# Altium PCB PCB2ASCi.PcbDoc
Units mm, origin at the board's own origin, x right, y up, seen from the top; angles counter-clockwise.
Board outline 54.74 x 52.45 mm, 2 copper layers (Top Layer, Bottom Layer); 51 components, 50 nets, 207 pads, 14 vias.
Unrouted connection lines stored in the file: 3.
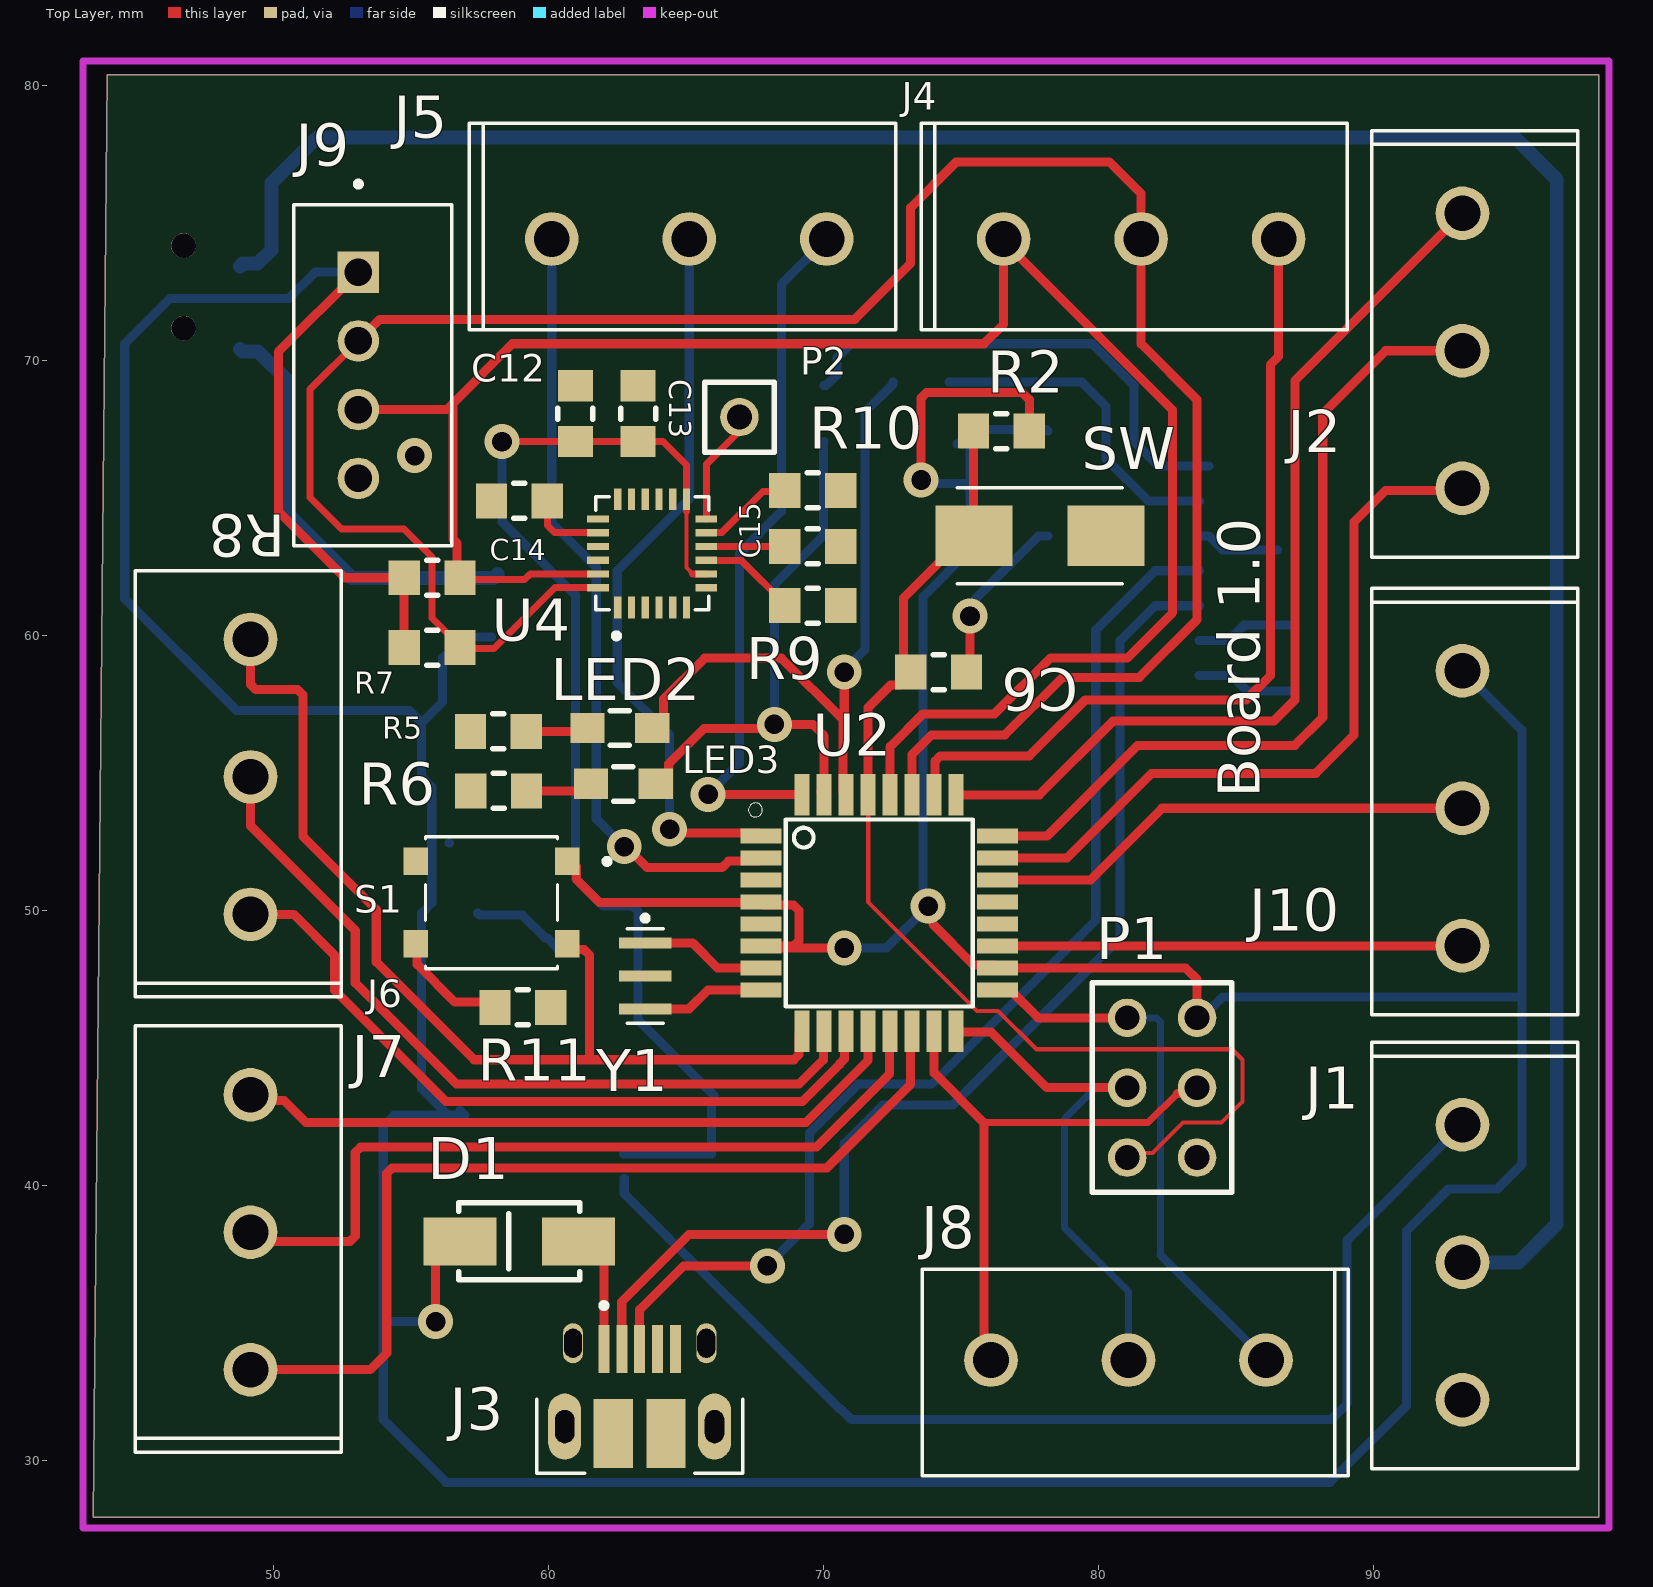
[diagram p0: Top Layer view]
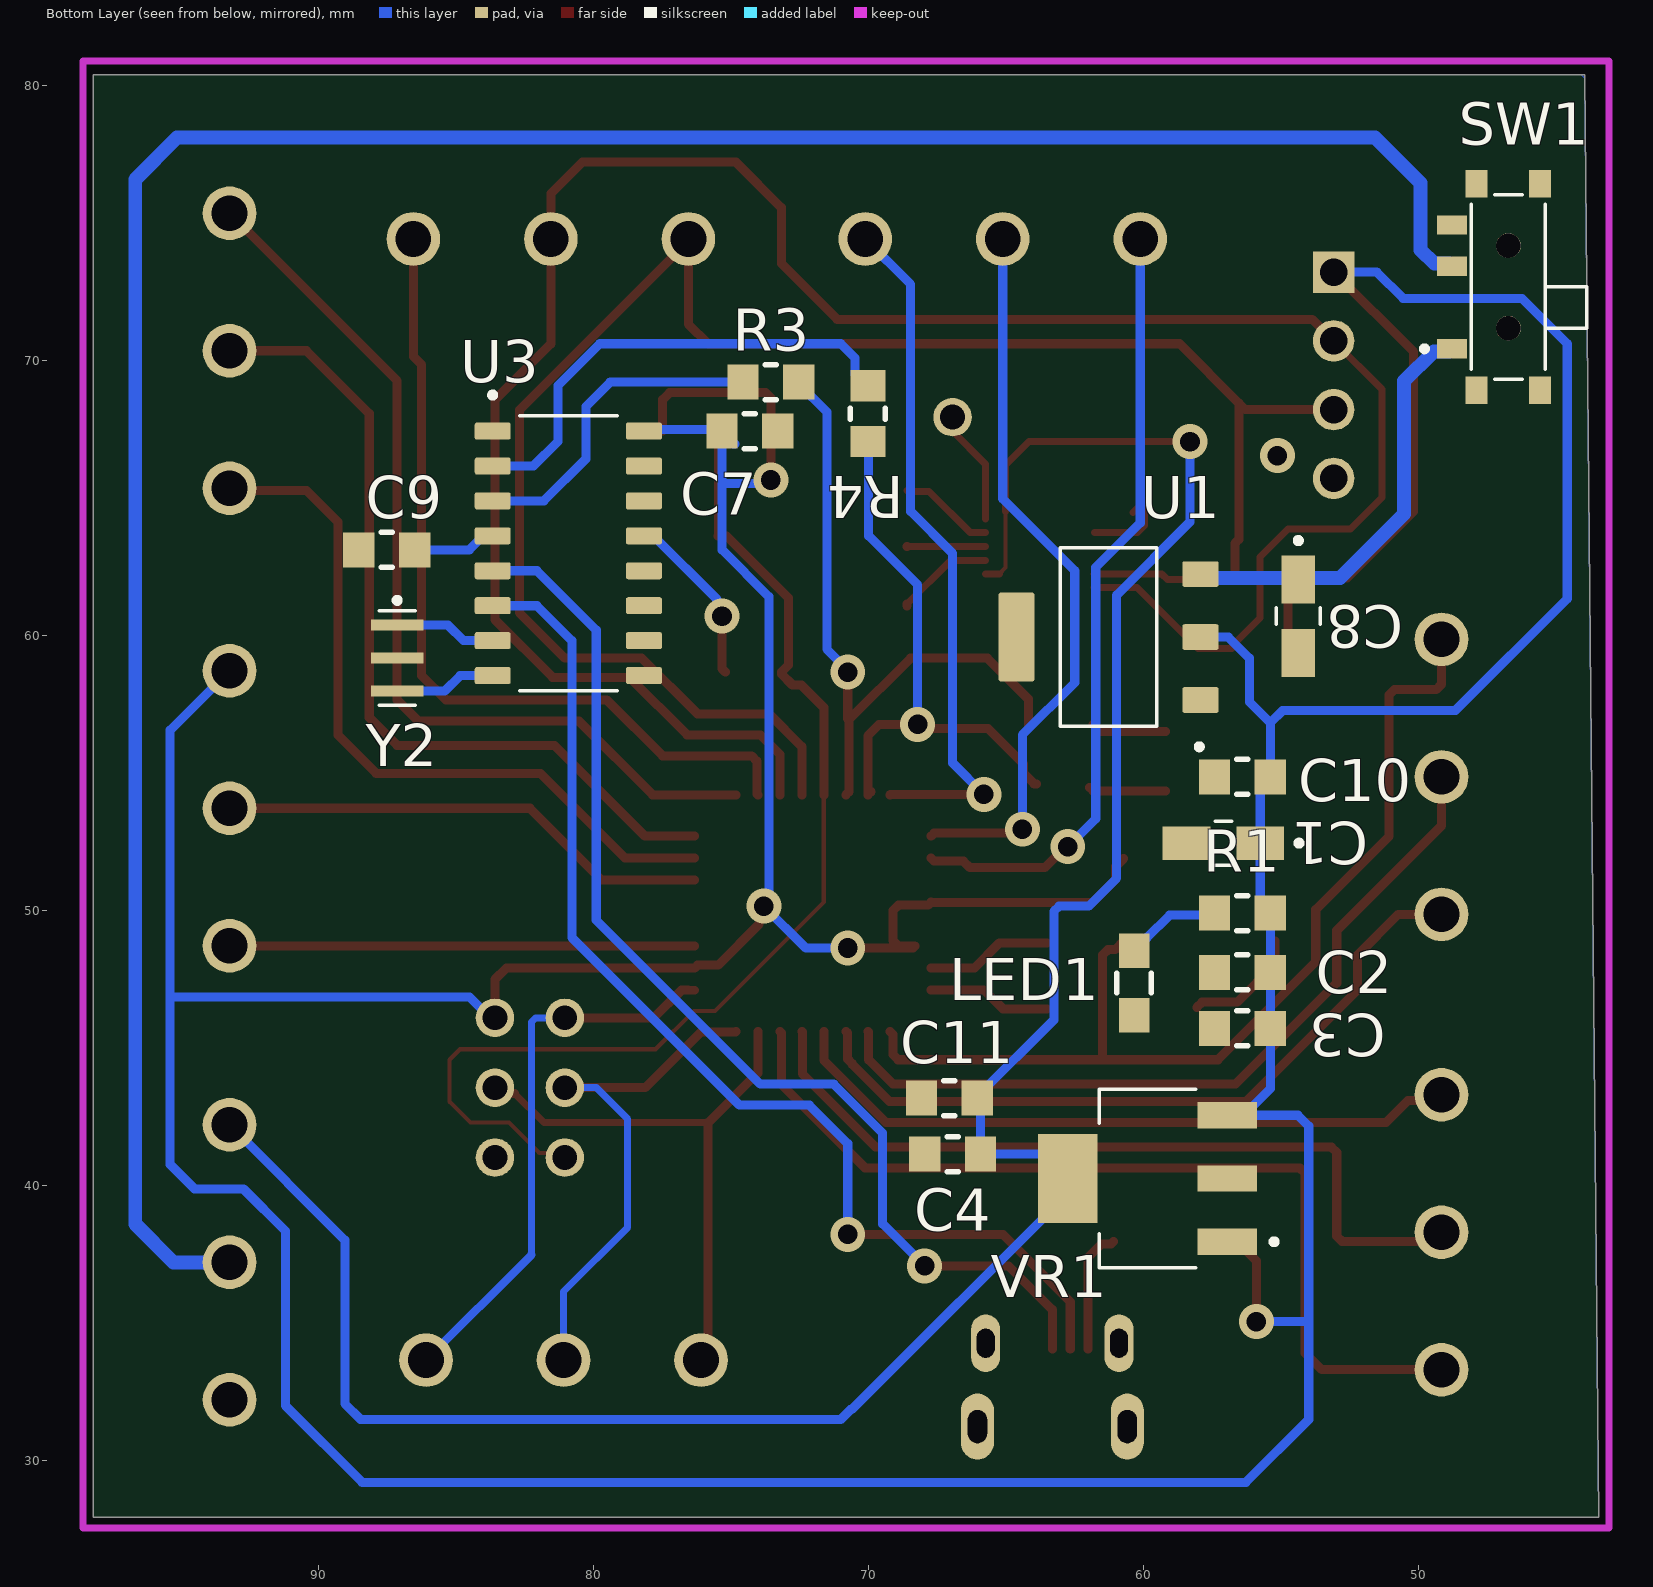
[diagram p1: Bottom Layer view, seen from below]

## Layer stack, top to bottom
Top Solder: solder mask 0.0102, Solder Resist, Dk 3.5
Top Layer: signal copper 0.0356
Dielectric 1: dielectric 0.32, FR-4, Dk 4.8
Bottom Layer: signal copper 0.0356
Bottom Solder: solder mask 0.0102, Solder Resist, Dk 3.5

## Board outline
43.942,80.391 98.171,80.391 98.171,27.94 43.434,27.94

## Design rules (kind name [scope] priority, off if disabled: settings)
AssemblyTestPointUsage [All] p0: scope1count=1 scope1_0_kind=Board scope1_0_value=Board scope2count=1 scope2_0_kind=Board scope2_0_value=Board commentlength=0
AssemblyTestpoint [All] p0: scope1count=1 scope1_0_kind=Board scope1_0_value=Board scope2count=1 scope2_0_kind=Board scope2_0_value=Board commentlength=0
Clearance [All] p0: scope1count=1 scope1_0_kind=Board scope1_0_value=Board scope2count=1 scope2_0_kind=Board scope2_0_value=Board commentlength=0 gap=0.178
Clearance [All] p1: gap=0.178 ignorepadtopadclearanceinfootprint=FALSE except(0: Arc-Hole Track-Hole SMDPad-Hole THPad-Hole Via-Hole Fill-Hole Poly-Hole Region-Hole Text-Hole)
ComponentClearance [All] p0: scope1count=1 scope1_0_kind=Board scope1_0_value=Board scope2count=1 scope2_0_kind=Board scope2_0_value=Board commentlength=0 gap=0.254 collisioncheckmode=3
DiffPairsRouting [All] p0: scope1count=1 scope1_0_kind=Board scope1_0_value=Board scope2count=1 scope2_0_kind=Board scope2_0_value=Board commentlength=0
FabricationTestPointUsage [All] p0: scope1count=1 scope1_0_kind=Board scope1_0_value=Board scope2count=1 scope2_0_kind=Board scope2_0_value=Board commentlength=0 valid=0 allowmultiple=FALSE
FabricationTestpoint [All] p0: scope1count=1 scope1_0_kind=Board scope1_0_value=Board scope2count=1 scope2_0_kind=Board scope2_0_value=Board commentlength=0 side=3 testpointundercomponent=TRUE minsize=1.016 maxsize=2.54 preferedsize=1.524 minholesize=0 maxholesize=1.016 preferedholesize=0.813 testpointgrid=0.025
FanoutControl Fanout_BGA [All] p0 off: scope1count=1 scope1_0_kind=Board scope1_0_value=Board scope2count=1 scope2_0_kind=Board scope2_0_value=Board commentlength=69 // Protel DXP Scope 1 Expression Was: IsBGA   Fanout_BGA (Default Rule)
FanoutControl Fanout_LCC [All] p0 off: scope1count=1 scope1_0_kind=Board scope1_0_value=Board scope2count=1 scope2_0_kind=Board scope2_0_value=Board commentlength=69 // Protel DXP Scope 1 Expression Was: IsLCC   Fanout_LCC (Default Rule)
FanoutControl Fanout_SOIC [All] p0 off: scope1count=1 scope1_0_kind=Board scope1_0_value=Board scope2count=1 scope2_0_kind=Board scope2_0_value=Board commentlength=71 // Protel DXP Scope 1 Expression Was: IsSOIC   Fanout_SOIC (Default Rule)
FanoutControl Fanout_Small [All] p0 off: scope1count=1 scope1_0_kind=Board scope1_0_value=Board scope2count=1 scope2_0_kind=Board scope2_0_value=Board commentlength=84 // Protel DXP Scope 1 Expression Was: (CompPinCount < 5)   Fanout_Small (Default Rule)
FanoutControl Fanout_Default [All] p0: scope1count=1 scope1_0_kind=Board scope1_0_value=Board scope2count=1 scope2_0_kind=Board scope2_0_value=Board commentlength=30 // Fanout_Default (Default Rule)
Height [All] p0: scope1count=1 scope1_0_kind=Board scope1_0_value=Board scope2count=1 scope2_0_kind=Board scope2_0_value=Board commentlength=0
HoleSize [All] p0: scope1count=1 scope1_0_kind=Board scope1_0_value=Board scope2count=1 scope2_0_kind=Board scope2_0_value=Board commentlength=0 absolutevalues=TRUE maxlimit=2.54 minlimit=0.025 maxpercent=80.000 minpercent=20.000
HoleToHoleClearance [All] p0: scope1count=1 scope1_0_kind=Board scope1_0_value=Board scope2count=1 scope2_0_kind=Board scope2_0_value=Board commentlength=0
LayerPairs [All] p0: scope1count=1 scope1_0_kind=Board scope1_0_value=Board scope2count=1 scope2_0_kind=Board scope2_0_value=Board commentlength=0 enforce=TRUE
MinimumSolderMaskSliver [All] p0: scope1count=1 scope1_0_kind=Board scope1_0_value=Board scope2count=1 scope2_0_kind=Board scope2_0_value=Board commentlength=0
NetAntennae [All] p0: scope1count=1 scope1_0_kind=Board scope1_0_value=Board scope2count=1 scope2_0_kind=Board scope2_0_value=Board commentlength=0
PasteMaskExpansion [All] p0: scope1count=1 scope1_0_kind=Board scope1_0_value=Board scope2count=1 scope2_0_kind=Board scope2_0_value=Board commentlength=0 expansion=0
PlaneClearance [All] p0: scope1count=1 scope1_0_kind=Board scope1_0_value=Board scope2count=1 scope2_0_kind=Board scope2_0_value=Board commentlength=0 clearance=0.508
PlaneConnect [All] p0: scope1count=1 scope1_0_kind=Board scope1_0_value=Board scope2count=1 scope2_0_kind=Board scope2_0_value=Board commentlength=0 planeconnectstyle=Relief reliefexpansion=0.508 reliefentries=4 reliefconductorwidth=0.254 reliefairgap=0.254
PolygonConnect [All] p0: scope1count=1 scope1_0_kind=Board scope1_0_value=Board scope2count=1 scope2_0_kind=Board scope2_0_value=Board commentlength=0 connectstyle=Relief reliefconductorwidth=0.254 reliefentries=4 polygonreliefangle="90 Angle"
PolygonConnect [All] p1: connectstyle=Relief reliefconductorwidth=0.254 reliefentries=4 polygonreliefangle="90 Angle" airgapwidth=0.254
RoutingCorners [All] p0: scope1count=1 scope1_0_kind=Board scope1_0_value=Board scope2count=1 scope2_0_kind=Board scope2_0_value=Board commentlength=0 cornerstyle=45-Degree minsetback=2.54 maxsetback=2.54
RoutingLayers [All] p0: scope1count=1 scope1_0_kind=Board scope1_0_value=Board scope2count=1 scope2_0_kind=Board scope2_0_value=Board commentlength=0 top layer=Automatic bottom layer=Automatic
RoutingPriority [All] p0: scope1count=1 scope1_0_kind=Board scope1_0_value=Board scope2count=1 scope2_0_kind=Board scope2_0_value=Board commentlength=0
RoutingTopology [All] p0: scope1count=1 scope1_0_kind=Board scope1_0_value=Board scope2count=1 scope2_0_kind=Board scope2_0_value=Board commentlength=0 topology=Shortest
RoutingVias [All] p0: scope1count=1 scope1_0_kind=Board scope1_0_value=Board scope2count=1 scope2_0_kind=Board scope2_0_value=Board commentlength=0 holewidth=0.711 width=1.27 viastyle="Through Hole" minholewidth=0.711 minwidth=1.27 maxholewidth=0.711 maxwidth=1.27
RoutingVias [All] p1: holewidth=0.711 width=1.27 viastyle="Through Hole" minholewidth=0.711 minwidth=1.27 maxholewidth=0.711 maxwidth=1.27
ShortCircuit [All] p0: scope1count=1 scope1_0_kind=Board scope1_0_value=Board scope2count=1 scope2_0_kind=Board scope2_0_value=Board commentlength=0 allowed=FALSE
SilkToBoardRegionClearance [All] p0: scope1count=1 scope1_0_kind=Board scope1_0_value=Board scope2count=1 scope2_0_kind=Board scope2_0_value=Board commentlength=0
SilkToSilkClearance [All] p0: scope1count=1 scope1_0_kind=Board scope1_0_value=Board scope2count=1 scope2_0_kind=Board scope2_0_value=Board commentlength=0
SilkToSolderMaskClearance [All] p0 off: scope1count=1 scope1_0_kind=Board scope1_0_value=Board scope2count=1 scope2_0_kind=Board scope2_0_value=Board commentlength=44 // Protel DXP Scope 1 Expression Was: IsPad
SolderMaskExpansion [All] p0: scope1count=1 scope1_0_kind=Board scope1_0_value=Board scope2count=1 scope2_0_kind=Board scope2_0_value=Board commentlength=0 expansion=0.102
SolderMaskExpansion [All] p1: expansion=0.102 istentingtop=FALSE
UnRoutedNet [All] p0: scope1count=1 scope1_0_kind=Board scope1_0_value=Board scope2count=1 scope2_0_kind=Board scope2_0_value=Board commentlength=0
UnpouredPolygon [All] p0: scope1count=1 scope1_0_kind=Board scope1_0_value=Board scope2count=1 scope2_0_kind=Board scope2_0_value=Board commentlength=0
Width [All] p0: scope1count=1 scope1_0_kind=Board scope1_0_value=Board scope2count=1 scope2_0_kind=Board scope2_0_value=Board commentlength=0 maxlimit=0.508 minlimit=0.152 preferedwidth=0.33
Width [All] p1: maxlimit=0.508 minlimit=0.152 preferedwidth=0.33 minimp=50.000000 maximp=50.000000 favimp=50.000000
30 further rules are at their usual default settings.

## Classes and differential pairs
component class Power: C1 C2 C3 C4 C8 C10 C11 LED1 R1 SW1 U1 VR1
component class atmega328P: C6 C7 C9 C12 C13 C14 C15 D1 J1 J2 J3 J4 J5 J6 J7 J8 J9 J10 LED2 LED3 P1 P2 R2 R3 R4 R5 R6 R7 R8 R9 R10 R11 S1 SW U2 U3 U4 Y1 Y2

## Components (designator, comment, footprint, x,y, rotation, side; value= is the part's Value field where it differs from the comment)
C1 "" CAPM3216X180 57.08,52.451 r0 bottom
C2 "0.1uF" SMD_CAPACITOR_0805 56.387,47.752 r0 bottom
C3 "10uF" SMD_CAPACITOR_0805 56.387,45.72 r0 bottom
C4 "10uF" SMD_CAPACITOR_0805 66.929,41.148 r0 bottom
C6 "100nF" SMD_CAPACITOR_0805 74.168,58.674 r0 top
C7 "100nF" SMD_CAPACITOR_0805 74.295,67.437 r0 bottom
C8 "10uF" CAPM3216X180 54.356,60.706 r270 bottom
C9 "100nF" SMD_CAPACITOR_0805 87.502,63.119 r180 bottom
C10 "0.1uF" SMD_CAPACITOR_0805 56.389,54.864 r0 bottom
C11 "0.1uF" SMD_CAPACITOR_0805 67.039,43.18 r0 bottom
C12 "10nF" SMD_CAPACITOR_0805 60.96,68.072 r270 top
C13 "0.1uF" SMD_CAPACITOR_0805 63.246,68.072 r270 top
C14 "2.2nF" SMD_CAPACITOR_0805 58.929,64.897 r0 top
C15 "0.1uF" SMD_CAPACITOR_0805 69.596,63.246 r180 top
D1 "*" SMD_DO-214AC 58.919,37.973 r180 top
J1 "691502710003" 691502710003 93.218,37.211 r270 top
J2 "691502710003" 691502710003 93.218,70.358 r270 top
J3 "10103594-0001LF" AMPHENOL_10103594-0001LF 63.3,31.238 r0 top
J4 "691502710003" 691502710003 81.534,74.422 r0 top
J5 "691502710003" 691502710003 65.104,74.422 r0 top
J6 "691502710003" 691502710003 49.149,54.864 r90 top
J7 "691502710003" 691502710003 49.149,38.307 r90 top
J8 "691502710003" 691502710003 81.073,33.655 r180 top
J9 "B4B-XH-A(LF)(SN)" JST_B4B-XH-A(LF)(SN) 53.594,69.469 r270 top
J10 "691502710003" 691502710003 93.218,53.721 r270 top
LED1 "*" SMD_LED_0805 60.325,47.371 r270 bottom
LED2 "*" SMD_LED_0805 62.579,56.642 r0 top
LED3 "*" SMD_LED_0805 62.706,54.61 r0 top
P1 "Header 2x3" THT_HEADER_100MIL_2X3_MALE 82.296,43.561 r0 top
P2 "Header 1x1" THT_HEADER_100MIL_1X1_MALE 66.929,67.945 r0 top
R1 "1K" SMD_RESISTOR_0805 56.387,49.911 r0 bottom
R2 "10K" SMD_RESISTOR_0805 76.455,67.437 r180 top
R3 "1K" SMD_RESISTOR_0805 73.532,69.215 r180 bottom
R4 "1K" SMD_RESISTOR_0805 70.009,68.072 r270 bottom
R5 "1K" SMD_RESISTOR_0805 58.166,56.515 r180 top
R6 "1K" SMD_RESISTOR_0805 58.167,54.356 r0 top
R7 "4,7K" SMD_RESISTOR_0805 55.753,59.563 r0 top
R8 "4,7K" SMD_RESISTOR_0805 55.752,62.103 r0 top
R9 "10K" SMD_RESISTOR_0805 69.596,61.087 r180 top
R10 "10K" SMD_RESISTOR_0805 69.596,65.278 r180 top
R11 "10K" SMD_RESISTOR_0805 59.056,46.482 r0 top
S1 "TL3313AF160QG" SW_TL3313AF160QG 57.912,50.292 r180 top
SW "147873-1" SW_147873-1 77.851,63.627 r0 top
SW1 "1437575-1" SW_MLL1200S 46.718,72.68 r90 bottom
U1 "AMS1117-5.0" SOT229P700X180-4N 61.257,59.948 r90 bottom
U2 "ATMEGA328-AU" QFP80P900X900X120-32N 72.009,49.911 r0 top locked
U3 "CH340G" SOIC127P600X180-16N 80.899,62.992 r180 bottom
U4 "MPU-6050" QFN50P400X400X95-24N 63.754,62.992 r90 top
VR1 "LM1117MPX-3.3" VREG_LM1117MPX-3.3 59.838,40.259 r0 bottom
Y1 "CSTCE12M0G15L08-R0" OSC_CSTCE12M0G15L08-R0 63.5,47.625 r270 top
Y2 "CSTCE12M0G15L08-R0" OSC_CSTCE12M0G15L08-R0 87.122,59.182 r270 bottom

## Footprints (in the part's own frame and the unit in brackets; to place one, negate y for a bottom-side part, rotate by r counter-clockwise, add the part's x,y. Pads: shape width x height; smd on the part's side, far side on the other; paste and mask are expansions set on the pad)
691502710003 [mm]
  round 1.95 hole 1.3: 1(-5,0) 2(0,0) 3(5,0)
  silkscreen extent -8,-3.3 7.5,4.2
AMPHENOL_10103594-0001LF [mm]
  rect 0.4x1.75 smd: 1(-1.3,2.825) 2(-0.65,2.825) 3(0,2.825) 4(0.65,2.825) 5(1.3,2.825)
  oval 0.73x1.46 hole 0.65 slot 1.05 at 90 deg mask+0: 6(-2.425,3.03) 7(2.425,3.03)
  oval 1.2x2.4 hole 0.7 slot 1.2 at 90 deg: 8(-2.725,0) 9(2.725,0)
  oval 1.05x2.1 smd far side paste-2: 10(-2.425,3.03) 11(2.425,3.03)
  rect 1.425x2.5 smd: S1(-0.963,-0.25) S2(0.962,-0.25)
  silkscreen extent -3.75,-1.7 3.75,4.5
CAPM3216X180 [mm]
  rect 1.74x1.23 smd: 1(-1.34,0) 2(1.34,0)
  silkscreen extent -2.85,-0.8 0.3,0.8
JST_B4B-XH-A(LF)(SN) [mm]
  rect 1.508x1.508 / inner round 1.508 / far side rect 1.508x1.508 hole 1: 1(-3.75,-0.525)
  round 1.508 hole 1: 2(-1.25,-0.525) 3(1.25,-0.525) 4(3.75,-0.525)
  silkscreen extent -7.05,-2.87 6.2,2.88
OSC_CSTCE12M0G15L08-R0 [mm]
  rect 0.4x1.9 smd: 1(-1.2,0) 2(0,0) 3(1.2,0)
  silkscreen extent -2.2,-0.65 1.72,0.65
QFN50P400X400X95-24N [mm]
  rect 0.79x0.26 smd: 1(-1.97,1.25) 2(-1.97,0.75) 3(-1.97,0.25) 4(-1.97,-0.25) 5(-1.97,-0.75) 6(-1.97,-1.25) 13(1.97,-1.25) 14(1.97,-0.75) 15(1.97,-0.25) 16(1.97,0.25) 17(1.97,0.75) 18(1.97,1.25)
  rect 0.26x0.79 smd: 7(-1.25,-1.97) 8(-0.75,-1.97) 9(-0.25,-1.97) 10(0.25,-1.97) 11(0.75,-1.97) 12(1.25,-1.97) 19(1.25,1.97) 20(0.75,1.97) 21(0.25,1.97) 22(-0.25,1.97) 23(-0.75,1.97) 24(-1.25,1.97)
  silkscreen extent -3.1,-2.05 2.05,2.05
QFP80P900X900X120-32N [mm]
  rect 1.5x0.55 smd: 1(-4.3,2.8) 2(-4.3,2) 3(-4.3,1.2) 4(-4.3,0.4) 5(-4.3,-0.4) 6(-4.3,-1.2) 7(-4.3,-2) 8(-4.3,-2.8) 17(4.3,-2.8) 18(4.3,-2) 19(4.3,-1.2) 20(4.3,-0.4) 21(4.3,0.4) 22(4.3,1.2) 23(4.3,2) 24(4.3,2.8)
  rect 0.55x1.5 smd: 9(-2.8,-4.3) 10(-2,-4.3) 11(-1.2,-4.3) 12(-0.4,-4.3) 13(0.4,-4.3) 14(1.2,-4.3) 15(2,-4.3) 16(2.8,-4.3) 25(2.8,4.3) 26(2,4.3) 27(1.2,4.3) 28(0.4,4.3) 29(-0.4,4.3) 30(-1.2,4.3) 31(-2,4.3) 32(-2.8,4.3)
  silkscreen extent -4.75,-3.4 3.4,4
SMD_CAPACITOR_0805 [mm]
  rect 1.14x1.27 smd: 1(-1.015,0) 2(1.015,0)
  silkscreen extent -0.2,-0.64 0.2,0.64
SMD_DO-214AC [mm]
  rect 2.65x1.75 smd: 1(-2.15,0) 2(2.15,0)
  silkscreen extent -2.2,-1.4 2.2,1.4
SMD_LED_0805 [mm]
  rect 1.25x1.1 smd mask+0: 1(-1.175,0) 2(1.175,0)
  silkscreen extent -0.35,-0.62 0.35,0.62
SMD_RESISTOR_0805 [mm]
  rect 1.14x1.27 smd: 1(-1.015,0) 2(1.015,0)
  silkscreen extent -0.2,-0.64 0.2,0.64
SOIC127P600X180-16N [mm]
  rrect25% 1.31x0.62 smd: 1(-2.75,4.445) 2(-2.75,3.175) 3(-2.75,1.905) 4(-2.75,0.635) 5(-2.75,-0.635) 6(-2.75,-1.905) 7(-2.75,-3.175) 8(-2.75,-4.445) 9(2.75,-4.445) 10(2.75,-3.175) 11(2.75,-1.905) 12(2.75,-0.635) 13(2.75,0.635) 14(2.75,1.905) 15(2.75,3.175) 16(2.75,4.445)
  silkscreen extent -2.85,-5 1.78,5.85
SOT229P700X180-4N [mm]
  rrect15% 0.93x1.31 smd: 1(-2.29,-3.345) 2(0,-3.345) 3(2.29,-3.345)
  rrect15% 3.24x1.31 smd: 4(0,3.345)
  silkscreen extent -4.09,-3.4 3.25,1.75
SW_147873-1 [mm]
  rect 2.8x2.2 smd: 1(-2.4,0) 2(2.4,0)
  silkscreen extent -3,-1.75 3,1.75
SW_MLL1200S [mm]
  rect 0.7x1.1 smd: 1(-2.25,2.05) 2(0.75,2.05) 3(2.25,2.05)
  rect 1x0.8 smd: G1(-3.75,1.15) G2(3.75,1.15) G3(-3.75,-1.15) G4(3.75,-1.15)
  round 0.9 hole 0.9 unplated: ""(-1.5,0) ""(1.5,0)
  silkscreen extent -3.35,-2.85 3.35,3.15
SW_TL3313AF160QG [mm]
  rect 0.9x1 smd: 1(-2.75,-1.5) 2(2.75,-1.5) 3(-2.75,1.5) 4(2.75,1.5)
  silkscreen extent -4.3,-2.4 2.4,2.4
THT_HEADER_100MIL_1X1_MALE [mm]
  round 1.4 hole 0.9: 1(0,0)
  silkscreen extent -1.27,-1.27 1.27,1.27
THT_HEADER_100MIL_2X3_MALE [mm]
  round 1.4 hole 0.9: 1(-1.27,2.54) 2(1.27,2.54) 3(-1.27,0) 4(1.27,0) 5(-1.27,-2.54) 6(1.27,-2.54)
  silkscreen extent -2.54,-3.81 2.54,3.81
VREG_LM1117MPX-3.3 [mm]
  rect 2.15x0.95 smd: 1(-2.9,2.3) 2(-2.9,0) 3(-2.9,-2.3)
  rect 2.15x3.25 smd: 4(2.9,0)
  silkscreen extent -4.7,-3.25 1.75,3.25

## Part data
C1 C8: library part F971A106KAA, "10 µF Molded Tantalum Capacitors 10 V 1206 (3216 Metric) 3Ohm"
C2 C3 C4 C6 C7 C9 C10 C11 C12 C13 C14 C15: library part Capacitor, "Capacitor"
D1: library part Diode_Schottky, "Diode Schottky"
J1 J2 J4 J5 J6 J7 J8 J10: "3 Position Wire to Board Terminal Block Horizontal with Board 0.197 (5.00mm) Through Hole"
J3: "USB - micro B USB 2.0 Receptacle Connector 5 Position Surface Mount, Right Angle; Through Hole"
J9: "Connector Header Through Hole 4 position 0.098 (2.50mm)"
LED1 LED2 LED3: library part LED, "LED"
P1: library part Header_2x3
P2: library part Header_1x1
R1 R2 R3 R4 R5 R6 R7 R8 R9 R10 R11: library part Resistor, "Resistor"
SW: "Switch Tactile OFF (ON) SPST Rectangular Button J-Bend 0.05A 24VDC 1.77N SMD T/R"
SW1: "Slide Switch 4PDT Through Hole, Right Angle"
U1: "1A LOW DROPOUT VOLTAGE REGULATOR"
U2: "AVR AVR® ATmega Microcontroller IC 8-Bit 20MHz 32KB (16K x 16) FLASH 32-TQFP (7x7)"
U3: "USB Interface Integrated Circuit"
U4: "MPU-6050 series Accelerometer, Gyroscope, 3 Axis Sensor Evaluation Board"
VR1: "800-mA 15-V linear voltage regulator"
Y1 Y2: "CSTCE Series 12 MHz 3.2 x 1.3 x 0.7 mm Built-in Capacitor SMT Resonator"

## Via types
v1: diameter 1.27, hole 0.711, Top Layer to Bottom Layer, 14 vias

## Nets (pads, with @x,y where several pads share a name; then routed paths per layer and width w, separated by ;. In a path a pad name is that pad's centre, name@x,y a point inside that pad or via, vN(x,y) a via of type N, cw(c..) or ccw(c..) an arc to the next point about the centre after c; other vN are vias at no path point)
+3.3: C4.1 C11.1 C12.2 C13.2 J1.1 U4.8 U4.13 VR1.4 | length 87
  Top Layer w0.152: 64.999,64.509 64.999,62.475 65.229,62.245
  Top Layer w0.254: v1(58.293,67.056) C12.2 C12.2 C13.2 64.145,67.057 65.004,66.198 U4.13 65.001,64.959 65.001,64.511 64.999,64.509 ; 65.229,62.245 65.721,62.245 U4.8
  Bottom Layer w0.33: v1(58.293,67.056) 58.293,64.135 60.96,61.468 60.96,51.181 61.976,50.165 63.053,50.165 63.246,49.972 63.246,46.024 66.025,43.245 C11.1 65.914,43.07 C4.1 VR1.4@62.717,41.148 ; VR1.4 62.738,39.709 70.57,31.877 70.612,31.877 70.993,31.496 88.453,31.496 89.027,32.07 89.027,38.02 J1.1
+12: J1.2 SW1.2 | length 93.8
  Bottom Layer w0.508: SW1.2 48.864,73.526 49.41,73.526 49.911,74.027 49.911,76.454 51.562,78.105 95.123,78.105 96.647,76.581 96.647,38.608 95.25,37.211 J1.2
GND: C1.2 C2.2 C3.2 C4.2 C7.1 C8.2 C9.1 C10.2 C11.2 C12.1 C13.1 C14.1 C15.1 J1.3 J3.5 J9.4 LED1.2 P1.6 R5.2 R6.1 R9.1 R10.1 R11.2 SW.2 U1.1 U2.3 U2.5 U2.21 U3.1 U4.1 U4.18 VR1.1 Y1.2 Y2.2
  other v1: 55.118,66.548
NetC6_1: C6.1 P1.5 R2.2 SW.1 U2.29 | length 41.8
  Top Layer w0.152: U2.29 71.609,50.311 75.565,46.355 76.327,46.355 77.724,44.958 84.836,44.958 85.217,44.577 85.217,43.053 84.455,42.291 83.058,42.291 81.955,41.188 81.193,41.188 P1.5
  Top Layer w0.33: U2.29 71.609,57.385 72.428,58.204 72.748,58.204 73.153,58.609 C6.1 72.898,58.929 72.898,61.374 75.151,63.627 SW.1 75.44,63.638 R2.2
NetC6_2: C6.2 U3.13 | length 6.4
  Top Layer w0.33: C6.2 75.311,58.802 v1(75.311,60.706)
  Bottom Layer w0.33: v1(75.311,60.706) 75.491,60.886 75.491,61.314 77.804,63.627 U3.13
NetC8_1: C8.1 SW1.1 U1.3 | length 15.7
  Bottom Layer w0.508: SW1.1 48.864,70.334 49.427,70.334 50.505,69.256 50.505,64.43 52.832,62.103 57.992,62.103 U1.3@58.123,62.234
NetC9_2: C9.2 U3.4 | length 3
  Bottom Layer w0.33: U3.4 83.994,63.627 84.502,63.119 C9.2
NetC14_2: C14.2 U4.20 | length 3.4
  Top Layer w0.254: C14.2@60.372,64.469 C14.2 59.944,64.008 60.198,63.754 U4.20@61.772,63.754
NetC15_2: C15.2 U4.10 | length 2.9
  Top Layer w0.254: U4.10 C15.2@68.577,63.242
  Top Layer w0.33: C15.2@68.577,63.242 C15.2
NetD1_1: D1.1 J3.1 | length 4.5
  Top Layer w0.33: D1.1 61.172,37.87 61.342,37.87 61.349,37.871 61.52,37.871 62,37.392 J3.1
NetJ2_1: J2.1 U2.25 | length 34
  Top Layer w0.33: U2.25 77.833,54.211 80.518,56.896 86.36,56.896 87.122,57.658 87.122,69.262 J2.1
NetJ2_2: J2.2 U2.24 | length 30.7
  Top Layer w0.33: U2.24 78.111,52.711 81.407,56.007 87.122,56.007 88.138,57.023 88.138,68.072 90.424,70.358 J2.2
NetJ2_3: J2.3 U2.23 | length 27
  Top Layer w0.33: U2.23 78.835,51.911 81.915,54.991 87.884,54.991 89.281,56.388 89.281,64.135 90.424,65.278 93.138,65.278 J2.3
NetJ3_2: J3.2 U3.6 | length 41.5
  Top Layer w0.33: J3.2 62.65,35.775 65.101,38.227 v1(70.739,38.227)
  Bottom Layer w0.33: v1(70.739,38.227) 70.739,41.529 72.136,42.926 74.676,42.926 80.772,49.022 80.772,59.817 82.042,61.087 U3.6
NetJ3_3: J3.3 U3.5 | length 41
  Top Layer w0.33: J3.3 63.299,35.486 64.897,37.084 v1(67.945,37.084)
  Bottom Layer w0.33: v1(67.945,37.084) 69.469,38.608 69.469,41.91 71.247,43.688 73.914,43.688 79.883,49.657 79.883,60.198 82.042,62.357 U3.5
NetJ4_1: J4.1 J9.3 R8.2 U2.28 U4.23 | length 69.6
  Top Layer w0.254: R8.2@56.767,62.038 59.117,62.038 59.321,62.242 U4.23
  Top Layer w0.33: J9.3 56.281,68.219 56.515,68.453 ; R8.2@56.767,62.038 R8.2 56.658,62.212 56.658,63.357 56.515,63.5 56.515,68.453 ; U2.28 72.409,55.96 73.599,57.15 76.2,57.15 78.232,59.182 81.026,59.182 82.677,60.833 82.677,68.199 J4.1@76.534,74.342 ; J4.1 J4.1@76.534,74.342 ; 56.515,68.453 58.674,70.612 75.819,70.612 76.534,71.327 J4.1@76.534,74.342
NetJ4_2: J4.2 J9.2 R7.2 U2.27 U4.24 | length 84.4
  Top Layer w0.254: J9.2 51.308,68.958 51.308,65.024 52.451,63.881 54.737,63.881 55.753,62.865 55.753,60.643 56.768,59.628 R7.2 ; R7.2@56.768,59.531 58.007,59.531 60.218,61.742 U4.24
  Top Layer w0.33: J9.2 53.851,71.501 71.12,71.501 73.152,73.533 73.152,75.565 74.803,77.216 80.391,77.216 81.534,76.073 J4.2 81.534,70.612 83.566,68.58 83.566,60.579 81.471,58.483 78.676,58.483 76.581,56.388 73.914,56.388 73.209,55.683 U2.27
NetJ4_3: J4.3 U2.26 | length 30.7
  Top Layer w0.33: U2.26 74.041,54.243 74.041,55.433 74.234,55.626 77.47,55.626 79.502,57.658 85.344,57.658 86.233,58.547 86.233,69.85 86.534,70.151 J4.3
NetJ5_1: J5.1 U2.2 | length 28.6
  Top Layer w0.33: v1(62.738,52.324) 62.812,52.324 63.574,51.562 66.294,51.562 66.533,51.801 67.599,51.801 U2.2
  Bottom Layer w0.33: J5.1 60.104,64.102 61.722,62.484 61.722,53.34 v1(62.738,52.324)
NetJ5_2: J5.2 U2.1 | length 26.8
  Top Layer w0.33: v1(64.389,52.959) 64.527,52.821 67.599,52.821 U2.1
  Bottom Layer w0.33: v1(64.389,52.959) 64.389,56.388 62.484,58.293 62.484,62.357 65.104,64.977 J5.2
NetJ5_3: J5.3 U2.32 | length 25.4
  Top Layer w0.33: v1(65.786,54.229) 69.191,54.229 U2.32
  Bottom Layer w0.33: v1(65.786,54.229) 66.929,55.372 66.929,62.992 68.453,64.516 68.453,72.771 J5.3
NetJ6_1: J6.1 U2.11 | length 26.1
  Top Layer w0.33: J6.1@49.911,49.864 50.72,49.864 52.197,48.387 52.197,47.117 56.261,43.053 69.215,43.053 70.576,44.414 70.576,44.433 70.749,44.606 70.749,45.551 U2.11
NetJ6_2: J6.2 U2.10 | length 29
  Top Layer w0.33: J6.2 49.149,53.086 52.959,49.276 52.959,47.371 56.642,43.688 69.088,43.688 69.977,44.577 69.977,45.579 U2.10
NetJ6_3: J6.3 S1.3 U2.9 | length 37.1
  Top Layer w0.33: J6.3 49.149,58.232 49.342,58.039 50.861,58.039 51.054,57.846 51.054,52.705 53.721,50.038 53.721,48.133 57.277,44.577 61.468,44.577 ; S1.3@60.706,48.895 61.017,48.584 61.275,48.584 61.468,48.391 61.468,44.577 ; U2.9 69.099,45.501 69.099,44.77 68.906,44.577 61.468,44.577
NetJ7_1: J7.1 U2.14 | length 34.1
  Top Layer w0.33: J7.1 53.5,33.307 54.102,33.909 54.102,40.447 54.295,40.64 70.104,40.64 73.152,43.688 73.152,45.554 U2.14
NetJ7_2: J7.2 U2.13 | length 29.2
  Top Layer w0.33: J7.2 49.483,37.973 52.766,37.973 52.959,38.166 52.959,41.209 53.152,41.402 69.723,41.402 72.39,44.069 72.39,45.592 U2.13
NetJ7_3: J7.3 U2.12 | length 24.9
  Top Layer w0.33: J7.3 49.357,43.099 50.36,43.099 51.168,42.291 69.342,42.291 71.609,44.558 U2.12
NetJ8_1: J8.1 P1.1 U2.17 | length 20.3
  Top Layer w0.305: U2.17 U2.17@76.547,47.111
  Top Layer w0.33: U2.17@76.547,47.111 76.784,47.111 77.794,46.101 P1.1
  Bottom Layer w0.254: P1.1 82.096,46.101 82.244,45.952 82.244,37.484
  Bottom Layer w0.305: 82.244,37.484 J8.1
NetJ8_2: J8.2 P1.3 U2.16 | length 19.6
  Top Layer w0.33: U2.16 74.827,45.593 76.073,45.593 78.105,43.561 P1.3
  Bottom Layer w0.254: P1.3 79.883,43.561 78.74,42.418 78.74,38.481 81.073,36.148 J8.2
NetJ8_3: J8.3 P1.4 U2.15 | length 21.1
  Top Layer w0.254: 75.819,42.291 81.788,42.291 82.853,43.356
  Top Layer w0.33: U2.15 74.009,44.101 75.819,42.291 75.819,33.909 J8.3 ; 82.853,43.356 83.361,43.356 P1.4
NetJ10_2: J10.2 U2.22 | length 18
  Top Layer w0.33: U2.22 79.686,51.111 82.296,53.721 J10.2
NetJ10_3: J10.3 U2.19 | length 16.9
  Top Layer w0.33: U2.19 76.314,48.716 93.213,48.716 J10.3
NetLED1_1: LED1.1 R1.2 | length 3.5
  Bottom Layer w0.33: R1.2 57.479,49.834 59.037,49.834 59.865,49.006 59.94,49.006 60.325,48.621 LED1.1
NetLED2_1: LED2.1 R5.1 | length 2.7
  Top Layer w0.33: R5.1 61.563,56.515 LED2.1@61.817,56.769
NetLED2_2: LED2.2 R3.2 U2.30 | length 24.8
  Top Layer w0.33: LED2.2@64.167,56.769 64.167,57.69 65.659,59.182 68.453,59.182 70.699,56.936 ; v1(70.739,58.674) 70.739,56.976 70.699,56.936 ; U2.30 70.699,54.321 70.699,56.936
  Bottom Layer w0.33: v1(70.739,58.674) 70.739,58.748 71.501,59.51 71.501,68.134 72.517,69.15 R3.2
NetLED3_1: LED3.1 R6.2 | length 2.8
  Top Layer w0.33: R6.2 61.817,54.356 LED3.1@61.944,54.483
NetLED3_2: LED3.2 R4.2 U2.31 | length 20.7
  Top Layer w0.33: LED3.2 63.956,54.61 64.341,54.995 64.341,55.324 65.634,56.617 68.047,56.617 v1(68.199,56.769) 69.596,56.769 70.009,56.356 U2.31 U2.31@69.899,54.321
  Bottom Layer w0.33: v1(68.199,56.769) 68.199,61.849 69.977,63.627 69.977,67.025 R4.2
NetP2_1: P2.1 U4.12 | length 4.2
  Top Layer w0.254: U4.12 65.724,66.232 66.929,67.437 P2.1
NetR3_1: R3.1 U3.3 | length 12
  Bottom Layer w0.33: R3.1 79.375,69.215 80.264,68.326 80.264,66.421 81.788,64.897 U3.3
NetR4_1: R4.1 U3.2 | length 18
  Bottom Layer w0.33: R4.1 70.074,69.087 70.479,69.492 70.479,70.098 70.993,70.612 79.756,70.612 81.28,69.088 81.28,67.056 82.169,66.167 U3.2 U3.2@83.994,66.167
NetR9_2: R9.2 U4.9 | length 3.6
  Top Layer w0.254: U4.9@65.728,62.738 66.995,62.738 R9.2@68.581,61.152
  Top Layer w0.33: R9.2 R9.2@68.581,61.152
NetR10_2: R10.2 U4.11 | length 3.5
  Top Layer w0.254: U4.11 65.727,63.745 66.285,63.745 67.779,65.239 68.542,65.239 R10.2
NetR11_1: R11.1 S1.4 | length 4.3
  Top Layer w0.33: S1.4@55.206,48.895 55.206,48.045 56.581,46.67 57.853,46.67 R11.1
NetSW1_G1: SW1.G1 SW1.G2 SW1.G3 SW1.G4
NetU2_7: U2.7 Y1.1 | length 4.6
  Top Layer w0.33: Y1.1 65.221,48.825 66.135,47.911 U2.7
NetU2_8: U2.8 Y1.3 | length 4.5
  Top Layer w0.33: Y1.3 65.094,46.425 65.786,47.117 67.703,47.117 U2.8
NetU2_20: U2.20
NetU3_7: U3.7 Y2.1 | length 3.7
  Bottom Layer w0.33: U3.7 84.709,59.817 85.274,60.382 Y2.1
NetU3_8: U3.8 Y2.3 | length 3.7
  Bottom Layer w0.33: U3.8 84.836,58.547 85.401,57.982 Y2.3
VCC: C1.1 C2.1 C3.1 C7.2 C10.1 D1.2 J9.1 J10.1 P1.2 R1.1 R2.1 R7.1 R8.1 S1.1 U1.2 U2.4 U2.6 U2.18 U3.16 VR1.3 | length 231.4
  Top Layer w0.33: J9.1 50.165,70.315 50.165,64.516 52.578,62.103 R8.1 R7.1 R7.1 ; v1(55.88,35.052) 55.88,37.263 56.59,37.973 D1.2 ; S1.1@60.706,51.895 61.001,51.6 61.001,51.14 61.849,50.292 67.69,50.292 U2.4 67.819,50.201 68.895,50.201 69.088,50.008 69.088,48.904 68.895,48.711 U2.6@68.302,48.711 ; U2.6@68.372,48.641 v1(70.739,48.641) ; v1(73.533,65.659) 73.533,68.641 73.726,68.834 77.216,68.834 77.47,68.58 R2.1 ; 73.967,49.507 75.453,48.021 76.199,48.021 U2.18 83.153,47.911 83.566,47.498 P1.2
  Bottom Layer w0.33: J9.1 51.502,73.219 50.546,72.263 46.228,72.263 44.577,70.612 44.577,61.341 48.641,57.277 54.927,57.277 55.374,56.83 ; v1(55.88,35.052) 53.975,35.052 ; C1.1@56.375,52.451 C1.1@56.376,52.452 ; VR1.3@56.77,42.727 VR1.3 VR1.3@56.338,42.559 ; U1.2 56.9,59.948 56.134,59.182 56.134,57.59 55.374,56.83 ; v1(70.739,48.641) 72.263,48.641 v1(73.787,50.165) 73.607,50.345 73.607,61.415 75.31,63.118 75.31,65.532 ; v1(73.533,65.659) 73.66,65.532 75.31,65.532 ; C7.2@74.84,66.967 74.905,66.967 C7.2@75.31,67.372 ; U3.16 78.084,67.502 75.375,67.502 C7.2 C7.2@75.31,67.372 ; P1.2 83.732,46.101 84.494,46.863 95.377,46.863 ; J10.1 95.377,56.562 95.377,46.863 ; 53.975,35.052 53.975,42.164 54.37,42.559 VR1.3@56.338,42.559 ; 53.975,35.052 53.975,31.496 56.261,29.21 88.392,29.21 91.186,32.004 91.186,38.354 92.71,39.878 94.488,39.878 95.377,40.767 95.377,46.863 ; 55.374,56.83 C10.1 55.74,54.498 C1.1 55.74,50.279 R1.1 C2.1 C3.1 55.372,43.525 VR1.3@56.338,42.559 ; 75.31,65.532 C7.2@75.31,67.372
pads on no net: J3.4 J3.6 J3.7 J3.8 J3.9 J3.10 J3.11 J3.S1 J3.S2 S1.2 SW1. SW1.3 U1.4 U3.9 U3.10 U3.11 U3.12 U3.14 U3.15 U4.2 U4.3 U4.4 U4.5 U4.6 U4.7 U4.14 U4.15 U4.16 U4.17 U4.19 U4.21 U4.22 VR1.2

## Polygon pours and split planes (outlines as drawn)
no net on Mechanical 15 (solid): 44.45,80.01 97.79,80.01 97.79,28.575 43.942,28.575
GND on Top Layer "GND_L01_P009" (solid, pour order 9): 43.942,80.391 98.171,80.391 98.171,27.94 43.434,27.94
GND on Bottom Layer "GND_L02_P011" (solid, pour order 11): 43.942,80.264 44.069,80.391 98.171,80.391 98.171,27.94 43.434,27.94

## Keep-outs
Keep-Out Layer:
  lines w0.254: 43.053,27.559 98.552,27.559 98.552,80.899 43.053,80.899 43.053,27.559

## Silkscreen, mask and mechanical layers (free items; w line width, h text height)
Top Overlay:
  text "Board 1.0" at 85.852,54.102 h1.52 r90

## Text inside footprints (layer, text, board x,y; h text height)
J1: Mechanical 13 "1" at 94.72,42.718 h1.27 r270
J2: Mechanical 13 "1" at 94.72,75.865 h1.27 r270
J4: Mechanical 13 "1" at 76.027,75.924 h1.27
J5: Mechanical 13 "1" at 59.597,75.924 h1.27
J6: Mechanical 13 "1" at 47.647,49.357 h1.27 r90
J7: Mechanical 13 "1" at 47.647,32.8 h1.27 r90
J8: Mechanical 13 "1" at 86.58,32.153 h1.27 r180
J10: Mechanical 13 "1" at 94.72,59.228 h1.27 r270
P1: Mechanical 10 "10uF" at 51.835,51.625 h1.52 r270